# Altium PCB PCB.PcbDoc
Units mm, origin at the board's own origin, x right, y up, seen from the top; angles counter-clockwise.
Board outline 44 x 66 mm, 4 copper layers (Top Layer, Power, Ground, Bottom Layer), stack 0.603 mm thick; 45 components, 55 nets, 243 pads, 50 vias.
Unrouted connection lines stored in the file: 24.
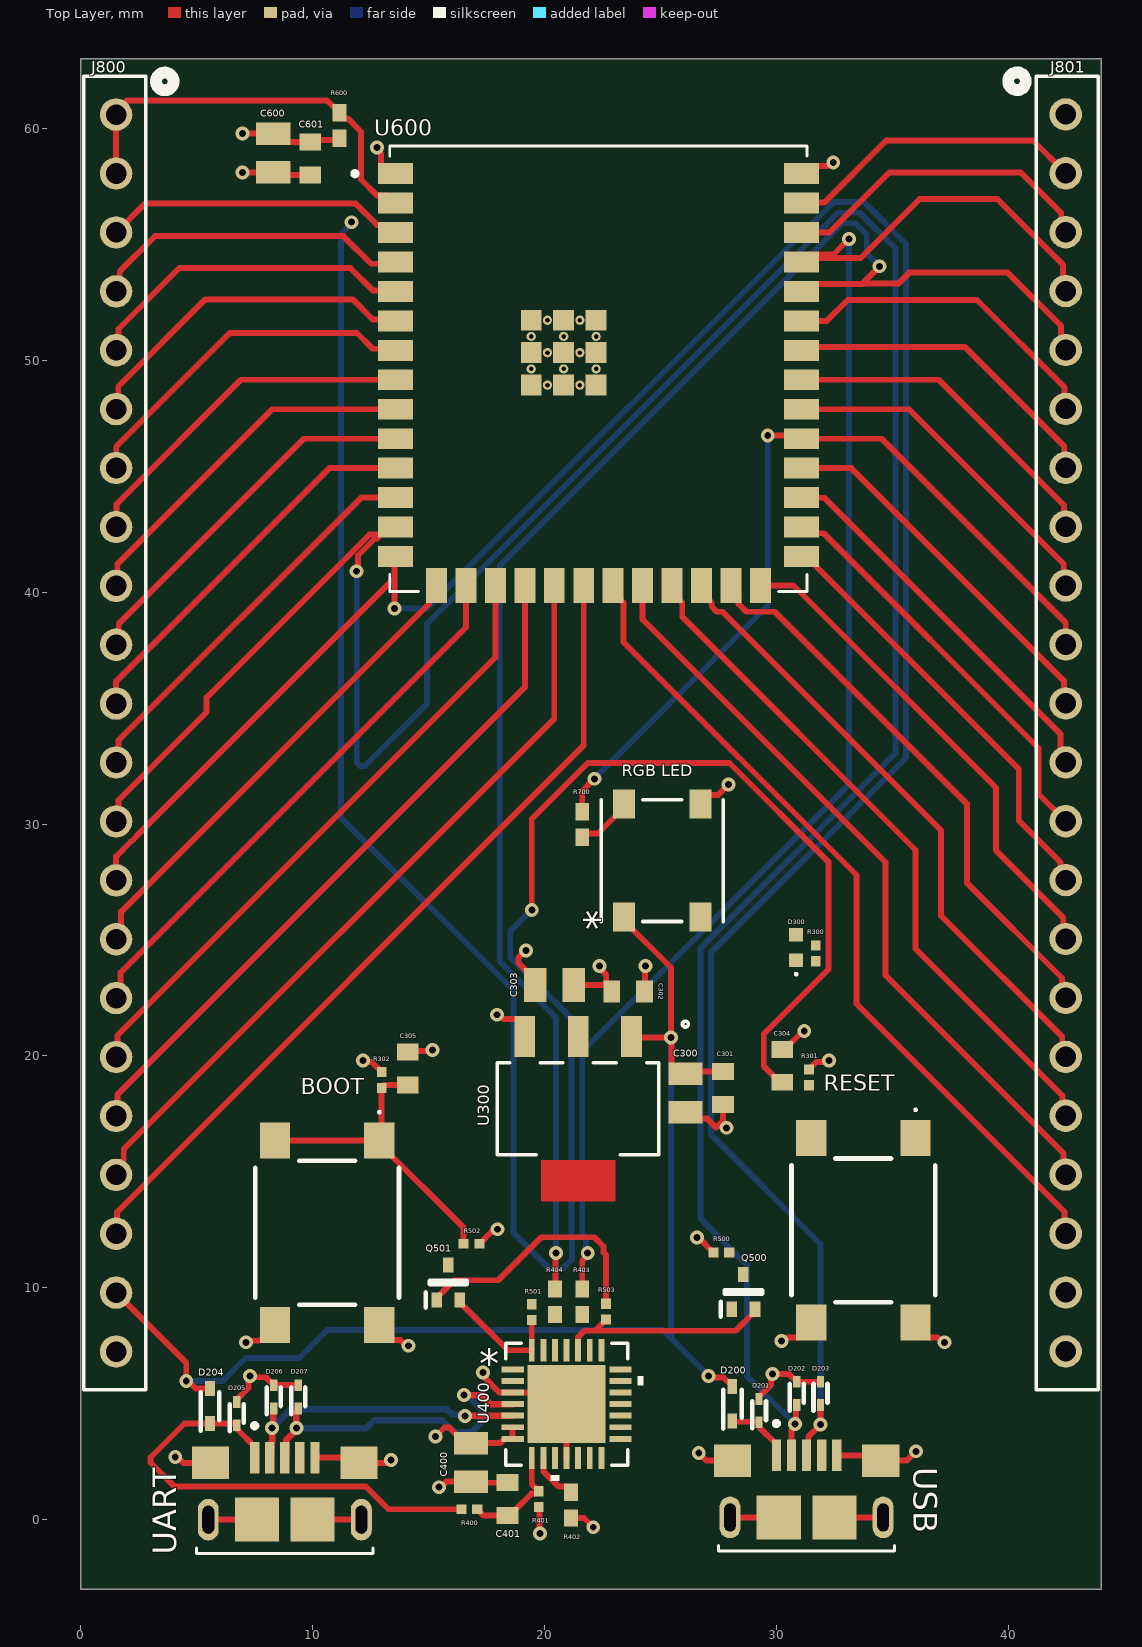
[diagram p0: Top Layer view]
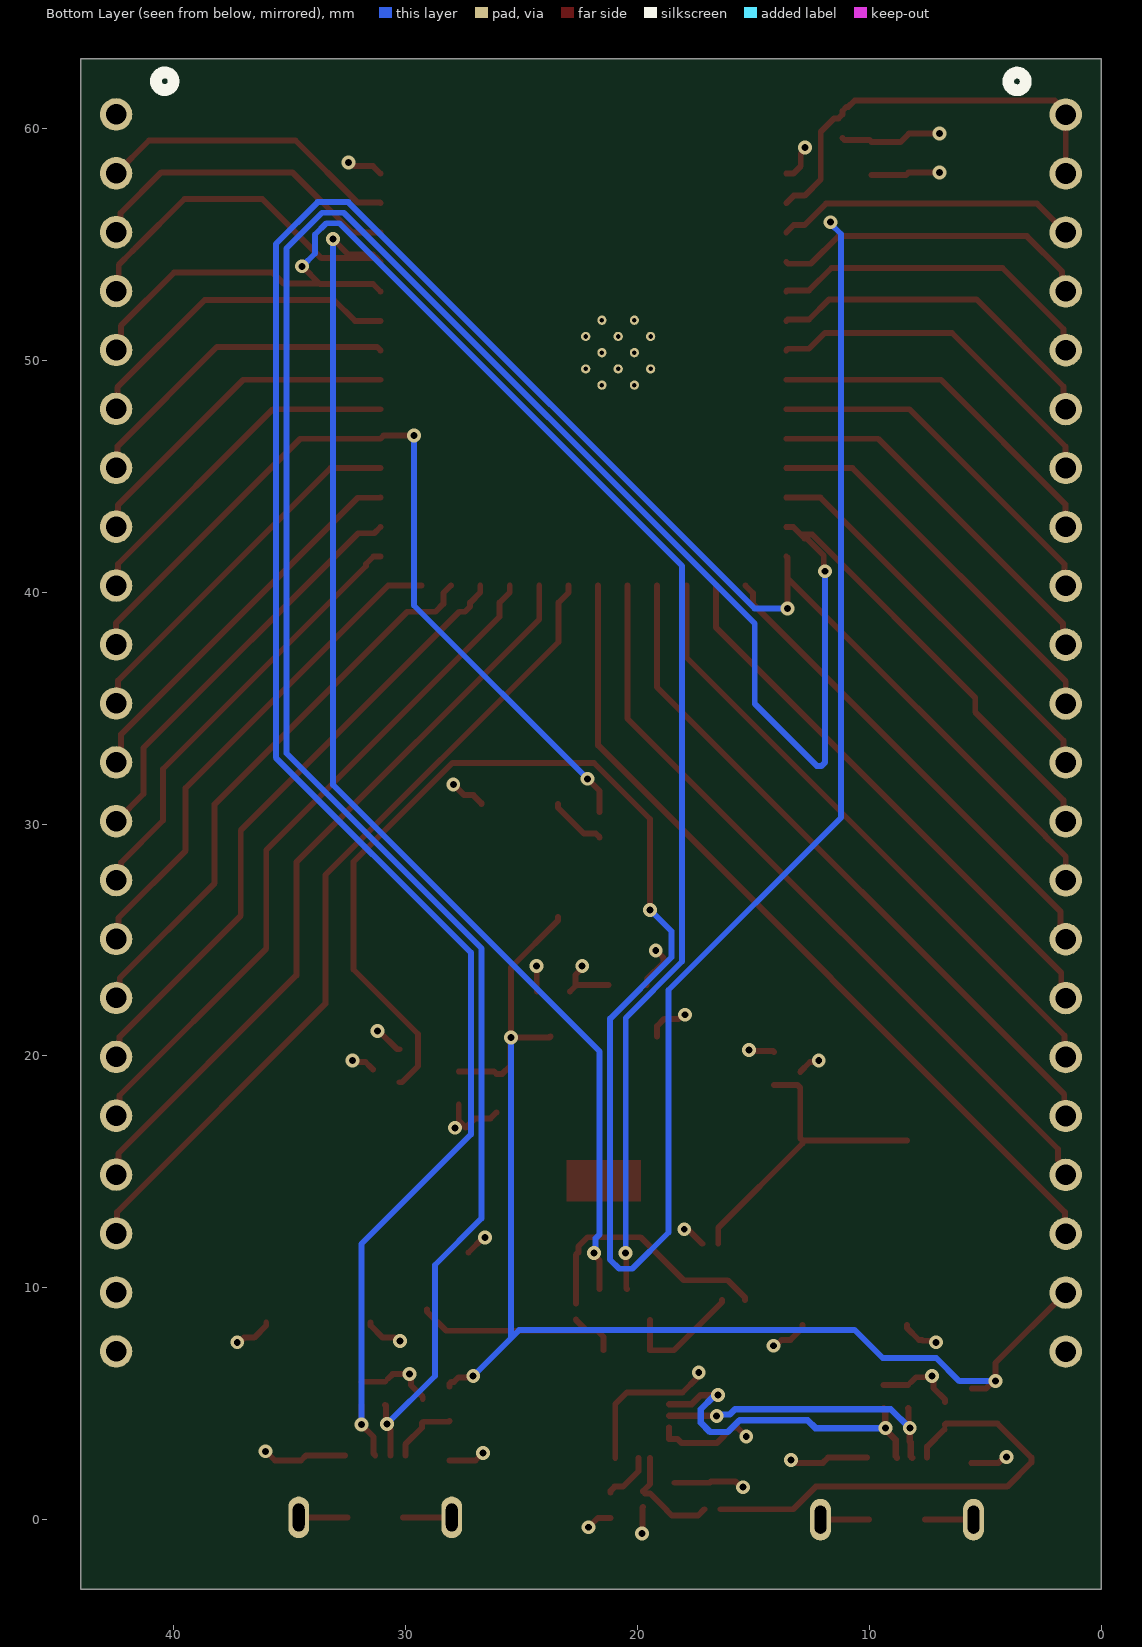
[diagram p1: Bottom Layer view, seen from below]
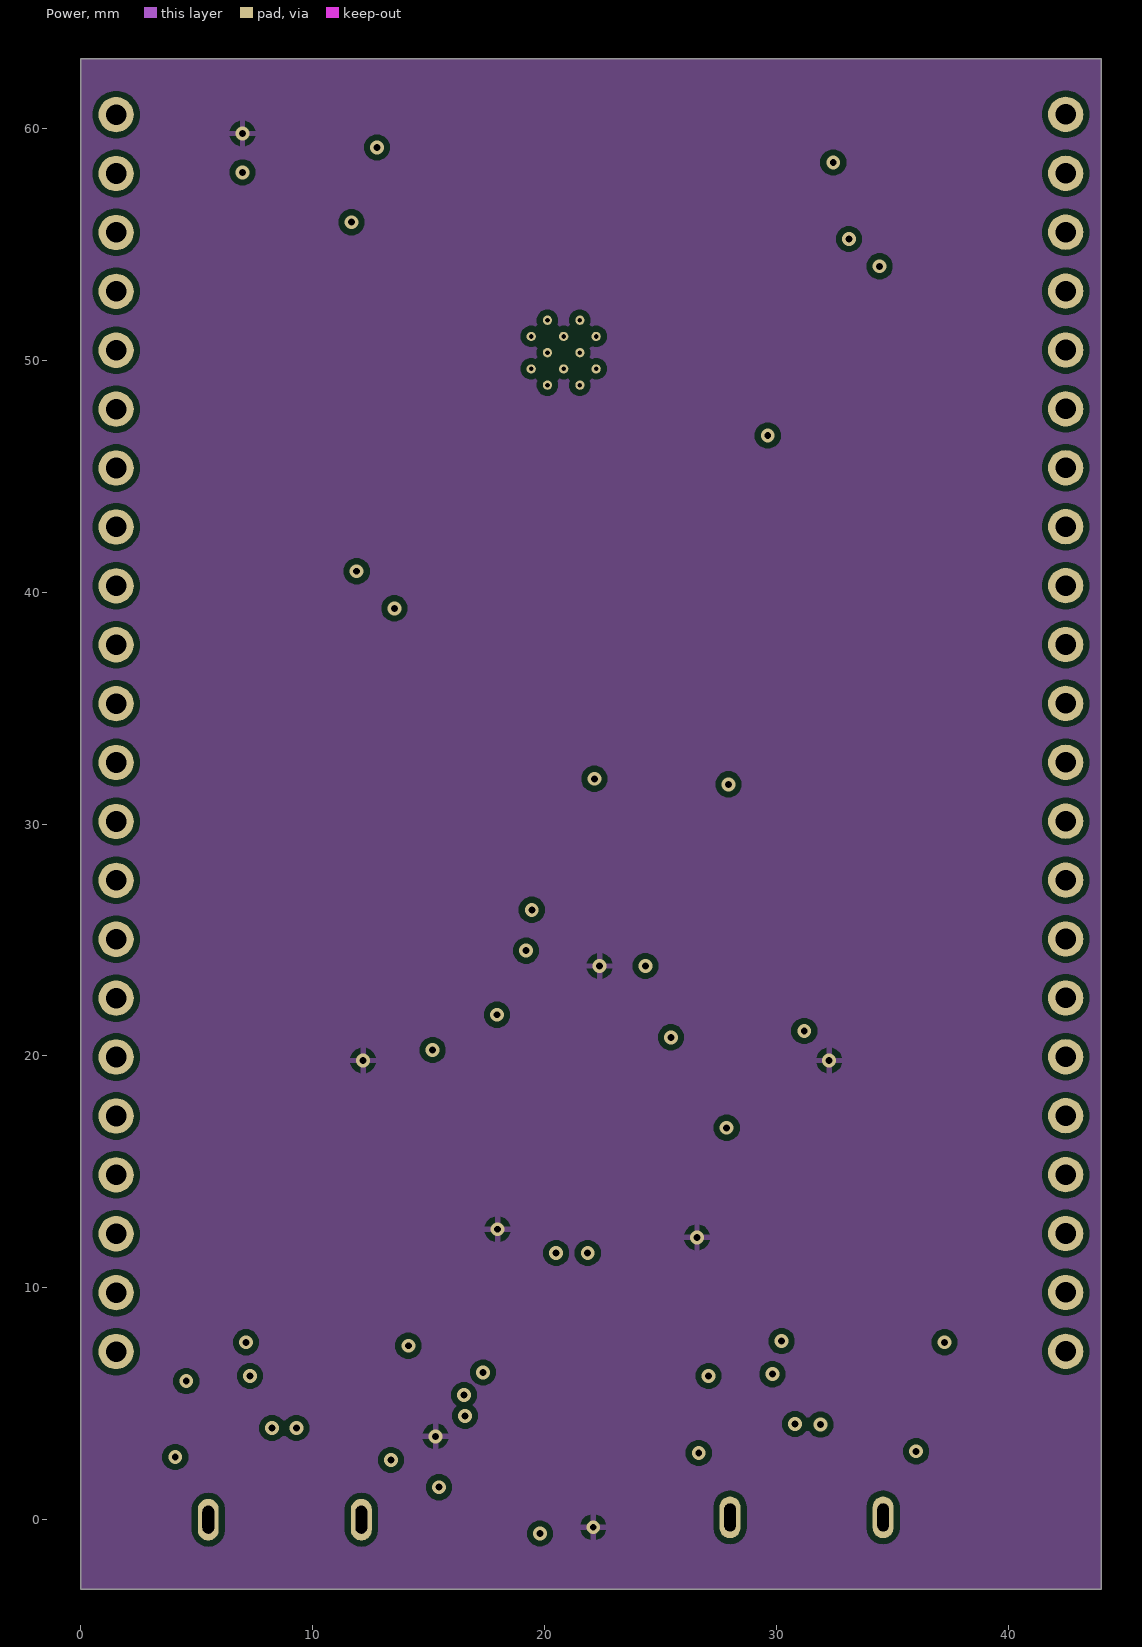
[diagram p2: Power]
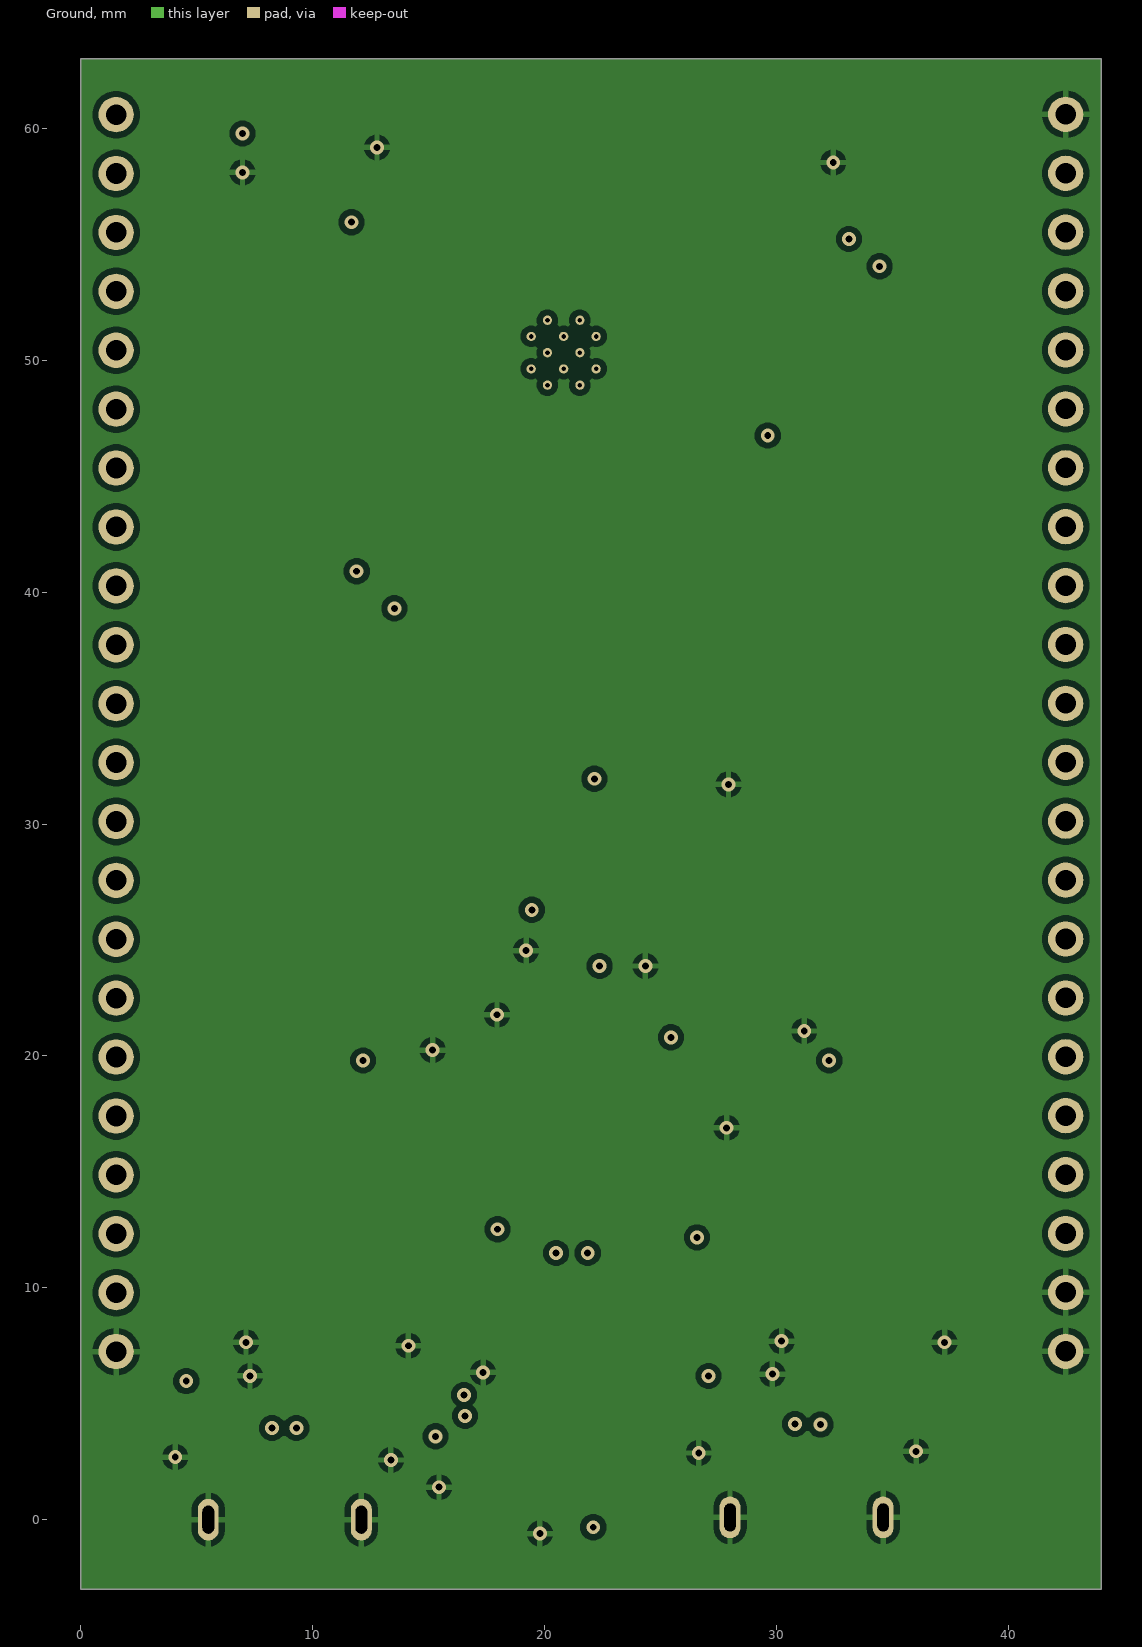
[diagram p3: Ground]
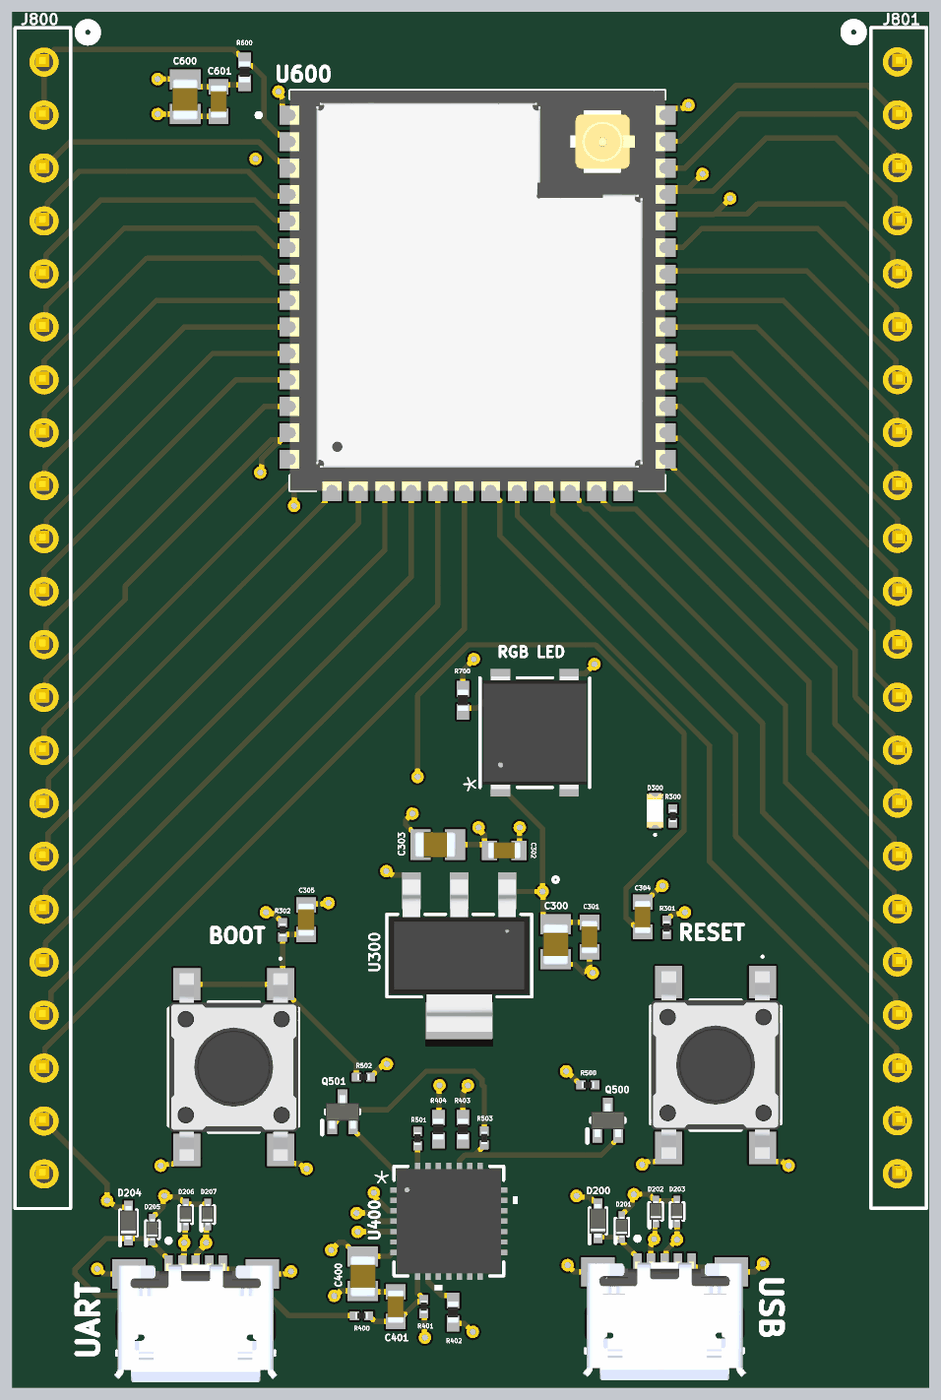
[diagram p4: 3D render of the assembled board from above, using the file's embedded part models]

## Layer stack, top to bottom
Top Solder: solder mask 0.0102, Solder Resist, Dk 3.5
Top Layer: signal copper 0.0356
Dielectric 2: prepreg 0.0711, PP-006, Dk 4.1
Power: signal copper 0.035
Dielectric 1: dielectric 0.32, FR-4, Dk 4.8
Ground: signal copper 0.035
Dielectric 3: prepreg 0.0711, PP-006, Dk 4.1
Bottom Layer: signal copper 0.0356
Bottom Solder: solder mask 0.0102, Solder Resist, Dk 3.5

## Board outline
0,-3 0,63 44,63 44,-3

## Design rules (kind name [scope] priority, off if disabled: settings)
Clearance [All] p1: gap=0.254 ignorepadtopadclearanceinfootprint=FALSE except(0.1: SMDPad-SMDPad; 0.2: Arc-Arc Arc-Track Arc-SMDPad Track-Track Track-SMDPad)
DiffPairsRouting USB_UART [InDifferentialPairClass('USB_UART_DIFF')] p1: maxlimit=0.127 minlimit=0.127 mostfreqgap=0.127 toplayer_minwidth=0.11 toplayer_maxwidth=0.11 toplayer_prefwidth=0.11 midlayer1_minwidth=0.057 midlayer1_maxwidth=0.057 midlayer1_prefwidth=0.057 midlayer2_minwidth=0.057 midlayer2_maxwidth=0.057 midlayer2_prefwidth=0.057 bottomlayer_minwidth=0.11 bottomlayer_maxwidth=0.11 bottomlayer_prefwidth=0.11 impedanceprofiledriven=TRUE impedanceprofileid={789BC2F2-8ED6-4A88-BA63-C0F51DC1F8E6} impedanceprofilevalue=90.000000 maxuncoupledlength=12.7
PolygonConnect [All] p1: connectstyle=Relief reliefconductorwidth=0.254 reliefentries=4 polygonreliefangle="90 Angle" airgapwidth=0.254
RoutingVias [All] p1: holewidth=0.711 width=1.27 viastyle="Through Hole" minholewidth=0.711 minwidth=1.27 maxholewidth=0.711 maxwidth=1.27
SolderMaskExpansion [All] p1: expansion=0.102 istentingtop=FALSE
SupplyNets "Schematic Supply Nets_5" [InNet('ESP_3V3')] p1: voltage=0.000
SupplyNets "Schematic Supply Nets_4" [InNet('VBBUS')] p2: voltage=0.000
SupplyNets "Schematic Supply Nets_3" [InNet('GND')] p3: voltage=0.000
SupplyNets "Schematic Supply Nets_2" [InNet('VCC_3V3')] p4: voltage=0.000
SupplyNets "Schematic Supply Nets_1" [InNet('VCC_5V')] p5: voltage=0.000
SupplyNets "Schematic Supply Nets" [InNet('VBUS')] p6: voltage=0.000
Width [All] p1: maxlimit=0.254 minlimit=0.2 preferedwidth=0.254 midlayer1_minwidth=0.254 midlayer2_minwidth=0.254 minimp=50.000000 maximp=50.000000 favimp=50.000000
29 further rules are at their usual default settings.

## Classes and differential pairs
component class USB: D200 D201 D202 D203 D204 D205 D206 D207 UART USB
component class USB_TO_UART_CONVERTER: C400 C401 R400 R401 R402 R403 R404 U400
component class RGB_LED: R700 "RGB LED"
component class POWER: BOOT C300 C301 C302 C303 C304 C305 D300 R300 R301 R302 RESET U300
component class PIN-HEADERS: J800 J801
component class ESP32-S3-WROOM-1U: C600 C601 R600 U600
component class AUTO_PROGRAMMING: Q500 Q501 R500 R501 R502 R503
differential pair USB_UART: +USB_UART_P -USB_UART_N

## Components (designator, comment, footprint, x,y, rotation, side; value= is the part's Value field where it differs from the comment)
BOOT "222AMVBAR" 222AMVBAR 10.625,12.375 r270 top
C300 "10 µF ±10% 25V" CAPC2012X145N 26.075,18.395 r90 top value="10 µF"
C301 "0.1 µF ±10% 50V" CAPC1608X90N 27.7,18.615 r90 top value="0 .1 µF"
C302 "0.1 µF ±10% 50V" CAPC1608X90N 23.61,22.775 r180 top value="0 .1 µF"
C303 "10 µF ±10% 25V" CAPC2012X145N 20.42,23.05 r0 top value="10 µF"
C304 "0.1 µF ±10% 50V" CAPC1608X90N 30.25,19.575 r270 top value="0 .1 µF"
C305 "0.1 µF ±10% 50V" CAPC1608X90N 14.1,19.45 r270 top value="0 .1 µF"
C400 "10 µF ±10% 25V" CAPC2012X145N 16.825,2.47 r90 top value="10 µF"
C401 "1 µF ±10% 10V" CAPC1608X90N 18.4,0.885 r270 top value="1 µF"
C600 "10 µF ±10% 25V" CAPC2012X145N 8.3,58.925 r90 top value="10 µF"
C601 "0.1 µF ±10% 50V" CAPC1608X90N 9.9,58.7 r90 top value="0 .1 µF"
D200 "370 mV @ 1 mA" SODFL1608X70N 28.1,5 r90 top
D201 "12.5V Clamp" SODFL1006X40N 29.25,4.7 r90 top
D202 "12.5V Clamp" SODFL1006X40N 30.875,5.45 r90 top
D203 "12.5V Clamp" SODFL1006X40N 31.9,5.45 r90 top
D204 "370 mV @ 1 mA" SODFL1608X70N 5.575,4.9 r90 top
D205 "12.5V Clamp" SODFL1006X40N 6.725,4.575 r90 top
D206 "12.5V Clamp" SODFL1006X40N 8.325,5.3 r90 top
D207 "12.5V Clamp" SODFL1006X40N 9.375,5.3 r90 top
D300 "LED RED" 5988A10107F 30.85,24.675 r90 top
J800 "CONN HEADER VERT 22POS" CON22_1X22_TU_TSW 1.525,33.92 r270 top
J801 "CONN HEADER VERT 22POS" CON22_1X22_TU_TSW 42.475,33.93 r270 top
Q500 "NSS20101JT1G" SOTFL50P160X80-3N 28.575,9.825 r90 top
Q501 "NSS20101JT1G" SOTFL50P160X80-3N 15.85,10.225 r90 top
R300 "3.4K OHM 1%" RESC0603X26N 31.7,24.425 r270 top value="3.4 kOhms"
R301 "10K OHM 1%" RESC0603X26N 31.4,19.075 r90 top value="10 kOhms"
R302 "10K OHM 1%" RESC0603X26N 12.975,18.96 r90 top value="10 kOhms"
R400 "22.1K OHM 1%" RESC0603X26N 16.76,0.45 r0 top value="22.1 kOhms"
R401 "47.5K OHM 1%" RESC0603X26N 19.75,0.885 r90 top value="47.5 kOhms"
R402 "1K Ohm 5%" RESC1005X40N 21.15,0.625 r270 top value="1K OHM"
R403 "1K Ohm 5%" RESC1005X40N 21.625,9.4 r90 top value="1K OHM"
R404 "1K Ohm 5%" RESC1005X40N 20.45,9.4 r90 top value="1K OHM"
R500 "10K OHM 1%" RESC0603X26N 27.625,11.525 r180 top value="10 kOhms"
R501 "10K OHM 1%" RESC0603X26N 19.45,8.95 r90 top value="10 kOhms"
R502 "10K OHM 1%" RESC0603X26N 16.85,11.9 r0 top value="10 kOhms"
R503 "10K OHM 1%" RESC0603X26N 22.65,8.975 r90 top value="10 kOhms"
R600 "1K Ohm 5%" RESC1005X40N 11.15,60.125 r90 top value="1K OHM"
R700 "1K Ohm 5%" RESC1005X40N 21.625,29.975 r270 top value="1K OHM"
RESET "222AMVBAR" 222AMVBAR 33.75,12.475 r270 top
"RGB LED" "ADDRESS RGB LED" COM-16347_SPK 25.075,28.425 r90 top (schematic designator LED700)
U300 "IC REG LINEAR 3.3V 1A" KC_3_ADI 21.45,17.725 r180 top
U400 "IC USB TO UART BRIDGE" QFN28_5X5_SIL 20.95,4.985 r0 top
U600 "ESP32-S3-WROOM-1U" XCVR_ESP32-S3-WROOM-1U 22.325,49.635 r0 top
UART "MICRO USB B" AMPHENOL_10118193-0001LF 8.8,0 r0 top
USB "MICRO USB B" AMPHENOL_10118193-0001LF 31.3,0.1 r0 top

## Footprints (in the part's own frame and the unit in brackets; to place one, negate y for a bottom-side part, rotate by r counter-clockwise, add the part's x,y. Pads: shape width x height; smd on the part's side, far side on the other; paste and mask are expansions set on the pad)
222AMVBAR [mm]
  rect 1.55x1.3 smd: 1(-3.975,2.25) 2(-3.975,-2.25) 3(3.975,2.25) 4(3.975,-2.25)
  silkscreen extent -5.25,-3.1 3.1,3.1, body extent -4.5,-3.1 4.5,3.1, height 5
5988A10107F [mm]
  rect 0.6x0.6 smd: 1(-0.55,0) 2(0.55,0)
  silkscreen extent -1.2,-0.05 -1.1,0.05, body extent -0.8,-0.4 0.8,0.4, height 0.7
AMPHENOL_10118193-0001LF [mm]
  rect 0.4x1.35 smd: 1(-1.3,2.675) 2(-0.65,2.675) 3(0,2.675) 4(0.65,2.675) 5(1.3,2.675)
  rect 1.6x1.4 smd: S1(-3.2,2.45) S2(3.2,2.45)
  rect 1.9x1.9 smd: S3(1.2,0) S4(-1.2,0)
  oval 0.9x1.8 hole 0.5 slot 1.2 at 90 deg: S5(-3.3,0) S6(3.3,0)
  silkscreen extent -3.8,-1.45 3.8,4.15, body extent -3.93,-2.76 3.93,2.95, height 2.85
CAPC1608X90N [mm]
  rect 0.73x0.94 smd: 1(-0.71,0) 2(0.71,0)
  body extent -0.8,-0.4 0.8,0.4, height 0.9
CAPC2012X145N [mm]
  rect 0.97x1.47 smd: 1(-0.83,0) 2(0.83,0)
  body extent -1.13,-0.63 0.87,0.63, height 1.45
COM-16347_SPK [mil]
  rect 49x37 smd paste+0 mask+0: 1(-96,64.96) 2(-96,-64.96) 3(96,-64.96) 4(96,64.96)
  silkscreen extent -104,-104 104,104, body extent -106,-99 106,99, height 63
CON22_1X22_TU_TSW [mil]
  round 55 / inner round 60 / far side round 55 hole 35 paste-99999 mask+0: 1(-1050,0) 2(-950,0) 3(-850,0) 4(-750,0) 5(-650,0) 6(-550,0) 7(-450,0) 8(-350,0) 9(-250,0) 10(-150,0) 11(-50,0) 12(50,0) 13(150,0) 14(250,0) 15(350,0) 16(450,0) 17(550,0) 18(650,0) 19(750,0) 20(850,0) 21(950,0) 22(1050,0)
  silkscreen extent -1121,-55 1115,98, body extent -1103,-53 1097,47, height 145
KC_3_ADI [mil]
  rect 35x69.5 smd paste+0 mask+0: 1(-90.55,-122.75) 2(0,-122.75) 3(90.55,-122.75)
  Top Layer region: 63,88 63,157.5 -63,157.5 -63,88
  silkscreen extent -187,-148 137,78, body extent -132,-144 132,144, height 67
QFN28_5X5_SIL [mil]
  rect 38x10 smd paste+0 mask+0: 1(-91.5,59.06) 2(-91.5,39.37) 3(-91.5,19.68) 4(-91.5,0) 5(-91.5,-19.68) 6(-91.5,-39.37) 7(-91.5,-59.06) 15(91.5,-59.06) 16(91.5,-39.37) 17(91.5,-19.68) 18(91.5,0) 19(91.5,19.68) 20(91.5,39.37) 21(91.5,59.06)
  rect 10x38 smd paste+0 mask+0: 8(-59.06,-91.5) 9(-39.37,-91.5) 10(-19.69,-91.5) 11(0,-91.5) 12(19.68,-91.5) 13(39.37,-91.5) 14(59.06,-91.5) 22(59.06,91.5) 23(39.37,91.5) 24(19.68,91.5) 25(0,91.5) 26(-19.69,91.5) 27(-39.37,91.5) 28(-59.06,91.5)
  rect 132x132 smd paste-66 mask+0: 29(0,0)
  silkscreen extent -104,-130 130,104, body extent -99,-99 99,99, height 32
RESC0603X26N [mm]
  rect 0.44x0.42 smd: 1(-0.34,0) 2(0.34,0)
  body extent -0.3,-0.15 0.3,0.15, height 0.26
RESC1005X40N [mm]
  rect 0.75x0.6 smd: 1(-0.55,0) 2(0.55,0)
  body extent -0.5,-0.25 0.5,0.25, height 0.4
SODFL1006X40N [mm]
  rect 0.51x0.32 smd: 1(-0.5,0) 2(0.5,0)
  silkscreen extent -0.75,-0.3 0.4,0.3, body extent -0.5,-0.3 0.5,0.3, height 0.4
SODFL1608X70N [mm]
  rect 0.64x0.42 smd: 1(-0.75,0) 2(0.75,0)
  silkscreen extent -1.07,-0.4 0.6,0.4, body extent -0.8,-0.4 0.8,0.4, height 0.7
SOTFL50P160X80-3N [mm]
  rect 0.65x0.46 smd: B(-0.75,0.5) C(0.75,0) E(-0.75,-0.5)
  silkscreen extent -1.07,-0.8 0.08,0.98, body extent -0.8,-0.8 0.8,0.8, height 0.8
XCVR_ESP32-S3-WROOM-1U [mm]
  rect 1.5x0.9 smd: 1(-8.75,8.41) 2(-8.75,7.14) 3(-8.75,5.87) 4(-8.75,4.6) 5(-8.75,3.33) 6(-8.75,2.06) 7(-8.75,0.79) 8(-8.75,-0.48) 9(-8.75,-1.75) 10(-8.75,-3.02) 11(-8.75,-4.29) 12(-8.75,-5.56) 13(-8.75,-6.83) 14(-8.75,-8.1) 27(8.75,-8.1) 28(8.75,-6.83) 29(8.75,-5.56) 30(8.75,-4.29) 31(8.75,-3.02) 32(8.75,-1.75) 33(8.75,-0.48) 34(8.75,0.79) 35(8.75,2.06) 36(8.75,3.33) 37(8.75,4.6) 38(8.75,5.87) 39(8.75,7.14) 40(8.75,8.41)
  rect 0.9x1.5 smd: 15(-6.985,-9.35) 16(-5.715,-9.35) 17(-4.445,-9.35) 18(-3.175,-9.35) 19(-1.905,-9.35) 20(-0.635,-9.35) 21(0.635,-9.35) 22(1.905,-9.35) 23(3.175,-9.35) 24(4.445,-9.35) 25(5.715,-9.35) 26(6.985,-9.35)
  rect 0.9x0.9 smd: 41_1(-2.9,2.09) 41_2(-1.5,2.09) 41_3(-0.1,2.09) 41_4(-2.9,0.69) 41_5(-1.5,0.69) 41_6(-0.1,0.69) 41_7(-2.9,-0.71) 41_8(-1.5,-0.71) 41_9(-0.1,-0.71)
  round 0.4 hole 0.2 mask+0: 41_10(-2.2,2.09) 41_11(-0.8,2.09) 41_12(-2.9,1.39) 41_13(-1.5,1.39) 41_14(-0.1,1.39) 41_15(-2.2,0.69) 41_16(-0.8,0.69) 41_17(-2.9,-0.01) 41_18(-1.5,-0.01) 41_19(-0.1,-0.01) 41_20(-2.2,-0.71) 41_21(-0.8,-0.71)
  silkscreen extent -10.6,-9.6 9,9.6, body extent -9,-9.6 9,9.6, height 3.35

## Part data
BOOT RESET: "Tactile Switches Gull Wing AF 160gf Act. Dir. Vertical", Manufacturer_Name=CTS, Mouser Part Number=774-222AMVBAR, Arrow Part Number=222AMVBAR, Arrow Price/Stock=https://www.arrow.com/en/products/222amvbar/cts, Datasheet Link=https://www.ctscorp.com/wp-content/uploads/222A.pdf, Geometry.Height=5.2mm, Manufacturer_Part_Number=222AMVBAR, Mouser Price/Stock=https://www.mouser.co.uk/ProductDetail/CTS-Electronic-Components/222AMVBAR?qs=%252BiOMRfgENTH99oc01%252BgePw%3D%3D
C300 C303 C400 C600: library part CL21A106KAYNNNE, "10 µF ±10% 25V Ceramic Capacitor X5R 0805 (2012 Metric)", Tolerance=±10%, Voltage - Rated=25V
C301 C302 C304 C305 C601: library part CL10B104KB8NNNC, "0.1 µF ±10% 50V Ceramic Capacitor X7R 0603 (1608 Metric)", Tolerance=±10%, Voltage - Rated="50 V"
C401: library part CL10B105KP8NNNC, "1 µF ±10% 10V Ceramic Capacitor X7R 0603 (1608 Metric)", Tolerance=±10%, Voltage - Rated="10 V"
D200 D204: library part RB751S40T1G, "Diode 30 V 30mA Surface Mount SOD-523", Current - Reverse Leakage @ Vr="500 nA @ 30 V", Voltage - DC Reverse (Vr) (Max)="30 V", Voltage - Forward (Vf) (Max) @ If="370 mV @ 1 mA"
D201 D202 D203 D205 D206 D207: library part SZESD9B5.0ST5G, "12.5V Clamp 15A (8/20µs) Ipp Tvs Diode Surface Mount SOD-923", Voltage - Breakdown (Min)=5.8V, Voltage - Clamping (Max) @ Ipp=12.5V, Voltage - Reverse Standoff (Typ)="5V (Max)"
D300: library part 5988A10107F, "598 A SMD LED 0402 pkg Red 635nm Low Current 5ma 7\" Reel", Current - Forward (mA)=20, Reverse Voltage (V)=5, Voltage - Forward (Vf) (Typ)=1.6V
J800 J801: library part TSW-122-08-T-S, "Connector Header Through Hole 22 position 0.100\" (2.54mm)", Mfr_Name="Samtec Inc", RefDes=RefDes, Type=Type
Q500 Q501: "Bipolar Transistors - BJT 20V NPN LOW VCE(SAT)", Collector Current − Continuous=1.0, Collector-Base Voltage=40, Collector-Emitter Voltage=20, Emitter-Base Voltage=6.0
R300: library part RC0603FR-073K4L, "3.4 kOhms ±1% 0.1W, 1/10W Chip Resistor 0603 (1608 Metric) Moisture Resistant Thick Film", Power (Watts)="0.1W, 1/10W", Tolerance=±1%
R301 R302 R500 R501 R502 R503: library part RC0402JR-0710KL, "10 kOhms ±5% 0.063W, 1/16W Chip Resistor 0402 (1005 Metric) Moisture Resistant Thick Film", Power (Watts)=1/16W, Tolerance=±5%
R400: library part RC0805FR-0722K1L, "22.1 kOhms ±1% 0.125W, 1/8W Chip Resistor 0805 (2012 Metric) Moisture Resistant Thick Film", Power (Watts)="0.125W, 1/8W", Tolerance=±1%
R401: library part RC0603FR-0747K5L, "47.5 kOhms ±1% 0.1W, 1/10W Chip Resistor 0603 (1608 Metric) Moisture Resistant Thick Film", Power (Watts)="0.1W, 1/10W", Tolerance=±1%
R402 R403 R404 R600 R700: library part RC0402JR071KL, "Res Thick Film 0402 1K Ohm 5% 0.063W(1/16W) +/-100ppm/C Epoxy SMD T/R", Tolerance=±5%
"RGB LED": library part COM-16347, "Addressable Lighting - LED Serial NRZ (Shift Register) Red, Green, Blue (RGB) 5.00mm L x 5.00mm W", Blue Voltage(V)=3.0-3.4, Power supply voltage=+3.5~+5.3, Red Voltage(V)=2.0-2.2, Green Voltage(V)=3.0-3.4, Type="LED Addressable"
U300: library part ADP3338AKCZ-3.3RL7, "Linear Voltage Regulator IC Positive Fixed 1 Output 1A SOT-223-3", Current - Output=1A, Voltage - Input (Max)=8V, Voltage - Output (Min/Fixed)=3.3V, Voltage Dropout (Max)="0.4V @ 1A"
U400: library part CP2102N-A02-GQFN28, "USB Bridge, USB to UART USB 2.0 UART Interface 28-QFN (5x5)", Current - Supply=9.5mA, Voltage - Supply="3V ~ 3.6V", Function="Bridge, USB to UART", Protocol=USB, Standards="USB 2.0"
U600: "2.4 GHz Wi-Fi (802.11 b/g/n) and Bluetooth 5 (LE) module", Package=Package, Availability="Not in stock", Check_prices=https://www.snapeda.com/parts/ESP32-S3-WROOM-1U/Espressif+Systems/view-part/?ref=eda, MF="Espressif Systems", MP=ESP32-S3-WROOM-1U, Price=None, SnapEDA_Link=https://www.snapeda.com/parts/ESP32-S3-WROOM-1U/Espressif+Systems/view-part/?ref=snap
UART USB: library part 10118193-0001LF, "Right Angle Surface Mount Mount Female USB Connector 100 V ac 1.8A", Package=None, Check_prices=https://www.snapeda.com/parts/10118193-0001LF/Amphenol+FCI/view-part/?ref=eda, MF="Amphenol ICC", MP=10118193-0001LF, SnapEDA_Link=https://www.snapeda.com/parts/10118193-0001LF/Amphenol+FCI/view-part/?ref=snap, Specifications="USB 2.0"

## Via types
v1: diameter 0.6, hole 0.3, Top Layer to Bottom Layer, 50 vias

## Nets (pads, with @x,y where several pads share a name; then routed paths per layer and width w, separated by ;. In a path a pad name is that pad's centre, name@x,y a point inside that pad or via, vN(x,y) a via of type N, cw(c..) or ccw(c..) an arc to the next point about the centre after c; other vN are vias at no path point)
DTR: Q501.E R501.1 U400.28 | length 5.4
  Top Layer w0.254: Q501.E 16.35,9.38 18.421,7.309 U400.28 R501.1
EN: C304.2 J800.3 Q500.C R301.1 R500.1 RESET.1 RESET.2 U600.3 | length 110.3
  Top Layer w0.254: J800.3 2.765,56.75 11.861,56.75 12.783,55.828 13.252,55.828 U600.3 ; v1(19.45,26.3) 19.45,30.213 21.868,32.631 27.977,32.631 32.237,28.371 32.237,23.73 29.453,20.946 29.453,19.557 30.145,18.865 C304.2
  Bottom Layer w0.254: v1(11.675,55.95) 11.675,55.899 11.219,55.443 11.219,30.276 18.656,22.839 18.656,12.381 20.218,10.819 20.782,10.819 21.181,11.218 21.181,12.11 21.171,12.12 21.171,21.608 18.523,24.256 18.523,25.373 v1(19.45,26.3)
ESP_3V3: J800.1 J800.2 R600.2 U600.2 | length 18
  Top Layer w0.254: J800.2 J800.1 1.525,60.725 2,61.2 10.625,61.2 10.902,60.923 10.977,60.923 11.15,60.75 R600.2 11.15,60.6 11.323,60.427 11.512,60.427 12.09,59.849 12.09,57.792 12.783,57.098 13.252,57.098 U600.2
GND: "RGB LED.3" BOOT.3 BOOT.4 C300.1 C301.1 C302.1 C303.1 C304.1 C305.1 C400.1 C401.1 C600.1 C601.1 D201.2 D202.2 D203.2 D205.2 D206.2 D207.2 D300.2 J800.22 J801.1 J801.21 J801.22 R401.1 RESET.3 RESET.4 U300.3 U400.3 U400.11 U400.29 U600.1 U600.40 U600.41_1 U600.41_2 U600.41_3 U600.41_4 U600.41_5 U600.41_6 U600.41_7 U600.41_8 U600.41_9 UART.5 UART.S1 UART.S2 UART.S3 UART.S4 UART.S5 UART.S6 USB.5 USB.S1 USB.S2 USB.S3 USB.S4 USB.S5 USB.S6 | length 61.1
  Top Layer w0.254: v1(4.075,2.7) 4.169,2.7 4.419,2.45 UART.S1 ; UART.S5 UART.S4 ; D205.2 6.725,5.17 7.234,5.679 7.234,6.134 v1(7.3,6.2) 7.356,6.144 7.981,6.144 D206.2@8.197,5.928 ; v1(6.975,58.1) 8.295,58.1 C600.1 8.405,57.99 C601.1 ; v1(7.125,7.65) 7.191,7.716 7.691,7.716 7.727,7.752 7.852,7.752 8.375,8.275 BOOT.4 ; D206.2 D207.2 ; UART.S3 UART.S6 ; UART.5 11.775,2.675 UART.S2 13.156,2.45 13.281,2.575 v1(13.375,2.575) ; v1(12.775,59.175) 12.775,59.081 12.952,58.904 12.952,58.368 13.275,58.045 U600.1 ; BOOT.3 12.875,8.275 13.398,7.752 13.779,7.752 14.031,7.5 v1(14.125,7.5) ; C305.1 14.145,20.205 15.13,20.205 v1(15.175,20.25) ; v1(15.45,1.4) 15.519,1.4 15.759,1.64 C400.1 16.87,1.595 C401.1 ; v1(17.35,6.35) 17.416,6.284 17.416,6.123 18.054,5.485 U400.3 20.45,5.485 U400.29 U400.11 ; v1(17.95,21.775) 18.044,21.775 18.22,21.599 18.832,21.599 19.15,21.281 U300.3 ; v1(19.204,24.538) 19.183,24.538 18.873,24.228 18.873,24.017 19.59,23.3 C303.1 ; R401.1 19.775,0.52 19.775,-0.575 v1(19.8,-0.6) ; C302.1 24.335,22.79 24.335,23.86 v1(24.35,23.875) ; C300.1 26.333,17.307 26.993,17.307 27.4,16.9 27.4,16.909 27.7,17.209 C301.1 ; v1(26.65,2.875) 26.975,2.55 USB.S1 ; 26.725,30.863 26.725,30.901 27.068,31.243 27.468,31.243 v1(27.935,31.71) ; 27.623,17.131 v1(27.854,16.9) ; USB.S5 USB.S4 ; D201.2 29.25,5.295 29.759,5.804 29.759,6.209 v1(29.825,6.275) 30.55,6.275 D202.2@30.747,6.078 ; v1(30.225,7.7) 30.319,7.7 30.471,7.852 30.977,7.852 31.5,8.375 RESET.4 ; C304.1 30.355,20.285 31.145,21.075 v1(31.2,21.075) ; D202.2 D203.2 ; U600.40 31.398,58.368 32.199,58.368 32.356,58.525 v1(32.45,58.525) ; USB.S3 USB.S6 ; USB.5 34.275,2.775 USB.S2 35.625,2.55 v1(36.025,2.95) ; RESET.3 36,8.375 36.523,7.852 36.954,7.852 37.156,7.65 v1(37.25,7.65)
GPIO0: BOOT.1 BOOT.2 C305.2 J801.14 Q501.C R302.1 R502.1 U600.27 | length 32.8
  Top Layer w0.254: BOOT.2 BOOT.1 ; C305.2 13.085,18.74 12.975,18.63 R302.1 12.975,16.45 BOOT.1 ; R502.1 16.51,12.59 12.875,16.225 BOOT.1 ; U600.27 31.375,41.535 31.698,41.212 31.698,41.127 40.45,32.375 40.45,30.15 42.256,28.344 42.256,27.799 J801.14
GPIO1: J801.2 U600.39 | length 13.1
  Top Layer w0.254: U600.39 31.095,56.795 32.057,56.795 34.738,59.475 41.06,59.475 J801.2
GPIO2: J801.3 U600.38 | length 13.9
  Top Layer w0.254: U600.38 32.28,55.505 34.875,58.1 40.525,58.1 42.281,56.344 42.281,55.714 J801.3
GPIO3: J800.15 U600.15 | length 21
  Top Layer w0.254: J800.15 1.744,25.249 1.744,26.219 15.017,39.492 15.017,39.962 U600.15
GPIO4: J800.4 U600.4 | length 14
  Top Layer w0.254: J800.4 1.682,53.127 1.682,53.832 3.2,55.35 11.325,55.35 12.518,54.157 13.497,54.157 U600.4
GPIO5: J800.5 U600.5 | length 14.4
  Top Layer w0.254: J800.5 1.624,50.529 1.624,51.349 4.25,53.975 11.628,53.975 12.593,53.01 13.53,53.01 U600.5
GPIO6: J800.6 U600.6 | length 14.9
  Top Layer w0.254: J800.6 1.617,47.982 1.617,48.867 5.375,52.625 11.724,52.625 12.593,51.756 13.514,51.756 U600.6
GPIO7: J800.7 U600.7 | length 15.3
  Top Layer w0.254: J800.7 1.531,45.356 1.531,46.281 6.425,51.175 11.911,51.175 12.593,50.493 13.507,50.493 U600.7
GPIO8: J800.12 U600.12 | length 17.3
  Top Layer w0.254: J800.12 1.622,32.747 1.622,33.597 12.1,44.075 U600.12
GPIO9: J800.17 U600.17 | length 27.1
  Top Layer w0.254: J800.17 1.581,20.006 1.581,20.881 17.88,37.18 U600.17
GPIO10: J800.18 U600.18 | length 30.2
  Top Layer w0.254: J800.18 1.591,17.476 1.591,18.341 19.15,35.9 U600.18
GPIO11: J800.19 U600.19 | length 33.2
  Top Layer w0.254: J800.19 1.525,15.179 1.857,15.511 1.857,15.982 20.42,34.545 U600.19
GPIO12: J800.20 U600.20 | length 36.3
  Top Layer w0.254: J800.20 1.561,12.366 1.561,13.261 21.69,33.39 U600.20
GPIO13: J801.20 U600.21 | length 36
  Top Layer w0.254: U600.21 22.96,39.985 23.399,39.546 23.399,37.851 33.45,27.8 33.45,22.25 42.429,13.271 42.429,12.386 J801.20
GPIO14: J801.19 U600.22 | length 33
  Top Layer w0.254: U600.22 24.23,38.82 34.7,28.35 34.7,23.475 42.376,15.799 42.376,14.979 J801.19
GPIO15: J800.8 U600.8 | length 15.2
  Top Layer w0.254: J800.8 1.541,42.826 1.541,43.791 6.905,49.155 U600.8
GPIO16: J800.9 U600.9 | length 15.7
  Top Layer w0.254: J800.9 1.576,40.321 1.576,41.201 8.26,47.885 U600.9
GPIO17: J800.10 U600.10 | length 16.2
  Top Layer w0.254: J800.10 1.637,37.842 1.637,38.637 9.615,46.615 U600.10
GPIO18: J800.11 U600.11 | length 16.8
  Top Layer w0.254: J800.11 1.525,36.15 10.72,45.345 U600.11
GPIO19: D202.1 J800.13 U600.13 USB.2 | length 122.4
  Top Layer w0.254: J800.13 1.627,30.212 1.627,31.027 5.425,34.825 5.425,35.45 12.457,42.482 U600.13@12.952,42.482 ; v1(11.9,40.9) 11.959,40.959 11.959,41.581 12.69,42.312 12.782,42.312 U600.13@12.952,42.482 ; U600.13 13.275,42.805 U600.13@12.952,42.482 ; USB.2 30.65,3.881 30.8,4.031 v1(30.8,4.125) 30.842,4.167 30.842,4.917 D202.1
  Bottom Layer w0.254: v1(11.9,40.9) 11.9,32.657 12.049,32.508 12.259,32.508 14.937,35.186 14.937,38.642 32.655,56.36 33.595,56.36 35.131,54.824 35.131,33.051 26.719,24.639 26.719,12.994 28.726,10.987 28.726,6.199 v1(30.8,4.125)
GPIO20: D203.1 J800.14 U600.14 USB.3 | length 109.1
  Top Layer w0.254: J800.14 1.525,28.6 2.168,29.243 ccw(c1.525,30.11) 2.392,29.467 13.525,40.6 ; v1(13.525,39.3) 13.525,40.6 ; U600.14 13.525,41.485 13.525,40.6 ; USB.3 31.373,2.848 31.373,3.573 v1(31.9,4.1) D203.1
  Bottom Layer w0.254: v1(13.525,39.3) 14.944,39.3 32.458,56.814 33.783,56.814 35.585,55.012 35.585,32.863 27.173,24.451 27.173,16.618 31.9,11.891 v1(31.9,4.1)
GPIO21: J801.18 U600.23 | length 29.9
  Top Layer w0.254: U600.23 25.5,39.985 25.939,39.546 25.939,38.936 36,28.875 36,24.625 42.331,18.294 42.331,17.564 J801.18
GPIO35: J801.13 U600.28 | length 17.8
  Top Layer w0.254: U600.28 31.343,42.537 32.038,42.537 41.3,33.275 41.3,31.295 J801.13
GPIO36: J801.12 U600.29 | length 16.7
  Top Layer w0.254: U600.29 31.082,44.068 32.057,44.068 42.256,33.869 42.256,32.879 J801.12
GPIO37: J801.11 U600.30 | length 16.1
  Top Layer w0.254: U600.30 33.23,45.345 42.394,36.181 42.394,35.281 J801.11
GPIO38: J801.10 R700.1 U600.31 | length 36.7
  Top Layer w0.254: R700.1 21.625,31.425 v1(22.15,31.95) ; v1(29.625,46.75) 30.94,46.75 U600.31 34.535,46.615 42.475,38.675 J801.10
  Bottom Layer w0.254: v1(22.15,31.95) 29.625,39.425 v1(29.625,46.75)
GPIO39: J801.9 U600.32 | length 15
  Top Layer w0.254: U600.32 35.715,47.885 42.389,41.211 42.389,40.366 J801.9
GPIO40: J801.8 U600.33 | length 14.5
  Top Layer w0.254: U600.33 36.995,49.155 42.399,43.751 42.399,42.896 J801.8
GPIO41: J801.7 U600.34 | length 14.1
  Top Layer w0.254: U600.34 31.225,50.575 38.125,50.575 42.409,46.291 42.409,45.426 J801.7
GPIO42: J801.6 U600.35 | length 14.2
  Top Layer w0.254: U600.35 32.17,51.695 33.075,52.6 38.65,52.6 42.419,48.831 42.419,47.956 J801.6
GPIO45: J801.15 U600.26 | length 21.5
  Top Layer w0.254: U600.26 30.74,40.285 39.475,31.55 39.475,28.85 42.371,25.954 42.371,25.144 J801.15
GPIO46: J800.16 U600.16 | length 24
  Top Layer w0.254: J800.16 1.717,22.682 1.717,23.592 16.61,38.485 U600.16
GPIO47: J801.17 U600.24 | length 27
  Top Layer w0.254: U600.24 26.77,39.985 27.209,39.546 27.209,39.377 27.432,39.154 27.671,39.154 37.1,29.725 37.1,26.05 42.323,20.827 42.323,20.112 J801.17
GPIO48: J801.16 U600.25 | length 24.5
  Top Layer w0.254: U600.25 28.363,39.962 28.363,39.493 28.702,39.154 29.921,39.154 38.225,30.85 38.225,27.45 42.316,23.359 42.316,22.659 J801.16
NetC401_2: C401.2 R400.2 R401.2 U400.8 | length 4.8
  Top Layer w0.254: R400.2 17.11,0.45 17.385,0.175 C401.2 18.505,0.175 18.743,0.413 18.743,0.43 19.445,1.132 19.667,1.132 19.75,1.215 R401.2 19.75,1.235 19.45,1.535 U400.8
NetD300_1: D300.1 R300.2
NetLED700_4: "RGB LED.4" R700.2 | length 2.5
  Top Layer w0.254: R700.2 21.792,29.592 22.306,29.592 23.425,30.711 23.425,30.863
NetQ500_B: Q500.B R501.2
NetQ501_B: Q501.B R503.2 | length 11
  Top Layer w0.254: Q501.B 15.35,9.57 16.103,10.323 17.998,10.323 19.856,12.181 21.907,12.181 22.144,12.181 22.543,11.782 22.543,11.529 22.65,11.422 R503.2
NetR402_1: R402.1 U400.9 | length 2.2
  Top Layer w0.254: U400.9 19.95,2.089 20.616,1.423 20.977,1.423 21.15,1.25 R402.1
RTS: Q500.E R503.1 U400.24 | length 9.4
  Top Layer w0.254: U400.24 21.45,7.881 21.717,8.148 22.173,8.148 ; R503.1 22.65,8.625 22.173,8.148 ; Q500.E 29.075,8.98 28.243,8.148 22.173,8.148
RXD: R403.1 U400.25
TXD: R404.1 U400.26
U0RXD: J801.5 R404.2 U600.36 | length 70.6
  Top Layer w0.254: R404.2 20.475,9.975 20.475,11.475 v1(20.5,11.5) ; U600.36 31.398,53.288 33.688,53.288 33.7,53.3 ; v1(34.45,54.05) 33.7,53.3 ; J801.5 42.271,50.644 42.271,51.479 39.975,53.775 35.725,53.775 35.25,53.3 33.7,53.3
  Bottom Layer w0.254: v1(20.5,11.5) 20.5,21.637 18.069,24.068 18.069,41.132 32.843,55.906 33.407,55.906 33.895,55.418 33.895,54.605 v1(34.45,54.05)
U0TXD: J801.4 R403.2 U600.37 | length 67.2
  Top Layer w0.254: R403.2 21.625,11.169 21.862,11.406 v1(21.862,11.5) ; U600.37 U600.37@31.24,54.4 ; v1(33.125,55.225) 32.458,54.558 31.398,54.558 U600.37@31.24,54.4 ; J801.4 42.363,53.092 42.363,54.112 41.786,54.689 cw(c42.475,55.52) 41.644,54.831 39.525,56.95 36.175,56.95 33.625,54.4 U600.37@31.24,54.4
  Bottom Layer w0.254: v1(21.862,11.5) 21.796,11.566 21.796,12.137 21.625,12.308 21.625,20.187 33.125,31.687 v1(33.125,55.225)
USB_UART_N: D206.1 U400.5 UART.2 | length 13
  Top Layer w0.279: UART.2 8.211,2.736 8.211,3.332 8.25,3.371 v1(8.25,3.95) 8.304,4.004 8.304,4.779 D206.1 ; v1(16.575,4.475) 16.58,4.48 18.621,4.48 U400.5
  Bottom Layer w0.279: v1(8.25,3.95) 9.068,4.768 15.787,4.768 16.019,4.536 16.514,4.536 v1(16.575,4.475)
USB_UART_P: D207.1 U400.4 UART.3 | length 14.7
  Top Layer w0.279: UART.3 8.861,2.736 8.861,3.441 9.3,3.88 v1(9.3,3.95) 9.3,4.63 9.375,4.705 D207.1 ; v1(16.525,5.375) 17.258,5.375 17.648,4.985 U400.4
  Bottom Layer w0.279: v1(9.3,3.95) 12.318,3.95 12.658,4.29 15.589,4.29 16.097,3.782 16.862,3.782 17.268,4.188 17.268,4.762 16.717,5.314 16.586,5.314 v1(16.525,5.375)
VBBUS: D200.1 D201.1 USB.1 | length 2.9
  Top Layer w0.254: D200.1 28.125,4.225 29.225,4.225 D201.1 29.283,4.167 29.283,3.967 30,3.25 USB.1
VBUS: D204.1 D205.1 R400.1 UART.1 | length 20.4
  Top Layer w0.254: D205.1 6.725,4.117 6.692,4.15 D204.1 4.475,4.15 3.005,2.68 3.005,2.47 4.052,1.423 12.302,1.423 13.275,0.45 R400.1 ; D205.1@6.758,3.892 7.5,3.15 UART.1
VCC_3V3: C302.2 C303.2 C400.2 C600.2 C601.2 R300.1 R301.2 R302.2 R402.2 R500.2 R502.2 R600.1 U300.2 U400.6 U400.7 | length 16.7
  Top Layer w0.254: v1(6.975,59.775) 8.28,59.775 C600.2 8.645,59.41 C601.2 9.982,59.492 11.067,59.492 R600.1 ; v1(12.175,19.8) 12.241,19.734 12.551,19.734 12.975,19.31 R302.2 ; v1(15.302,3.596) 15.685,3.98 15.895,3.98 16.575,3.3 18.085,3.3 18.27,3.485 U400.7 U400.6 ; R502.2 17.2,11.9 17.759,12.459 17.909,12.459 v1(17.975,12.525) ; R402.2 21.7,0.075 v1(22.1,-0.325) ; C303.2 C302.2@22.662,23.05 ; v1(22.375,23.875) 22.375,23.781 22.662,23.494 C302.2@22.662,23.05 ; C302.2 22.662,23.013 C302.2@22.662,23.05 ; v1(26.575,12.175) 26.625,12.175 27.275,11.525 R500.2 ; R301.2 31.4,19.425 31.483,19.508 31.493,19.508 31.719,19.734 32.209,19.734 v1(32.275,19.8)
VCC_5V: "RGB LED.1" C300.2 C301.2 D200.2 D204.2 J800.21 U300.1 | length 56.1
  Top Layer w0.254: J800.21 4.55,6.765 v1(4.55,5.975) 4.644,5.975 4.969,5.65 D204.2 ; 23.425,25.987 23.425,25.834 25.45,23.809 v1(25.45,20.8) ; U300.1 23.793,20.8 v1(25.45,20.8) ; v1(27.075,6.2) 27.141,6.134 27.716,6.134 27.907,5.943 28.017,5.943 28.1,5.86 D200.2 ; C301.2 26.175,19.325 C300.2 25.825,19.225 25.467,19.583 25.467,20.783 v1(25.45,20.8)
  Bottom Layer w0.254: v1(4.55,5.975) 6.112,5.975 7.106,6.969 9.416,6.969 10.628,8.181 25.094,8.181 25.45,7.825 ; v1(25.45,20.8) 25.45,7.825 ; v1(27.075,6.2) 25.45,7.825
pads on no net: "RGB LED.2" U400.1 U400.2 U400.10 U400.12 U400.13 U400.14 U400.15 U400.16 U400.17 U400.18 U400.19 U400.20 U400.21 U400.22 U400.23 U400.27 U600.41_10 U600.41_11 U600.41_12 U600.41_13 U600.41_14 U600.41_15 U600.41_16 U600.41_17 U600.41_18 U600.41_19 U600.41_20 U600.41_21 UART.4 USB.4

## Polygon pours and split planes (outlines as drawn)
VCC_3V3 on Power "VCC_3V3_L02_P000" (solid, pour order 0): 0,63 44,63 44,-3 0,-3
GND on Ground "GND_L03_P001" (solid, pour order 1): 0,63 44,63 44,-3 0,-3

## Text inside footprints (layer, text, board x,y; h text height)
"RGB LED": Top Overlay "*" at 22.955,25.415 h1.27 r90; Mechanical 13 "*" at 23.755,26.177 h1.27 r90
U400: Top Overlay "*" at 17.191,6.1 h1.27; Mechanical 13 "*" at 18.791,6.1 h1.27
UART: Mechanical 13 "PCB END" at 13.65,-1.2 h0.41
USB: Mechanical 13 "PCB END" at 36.15,-1.1 h0.41